# Altium PCB PCB1.PcbDoc (part 1 of 2)
Units mm, origin at the board's own origin, x right, y up, seen from the top; angles counter-clockwise.
Board outline 99.82 x 99.95 mm, 2 copper layers (Top Layer, Bottom Layer); 59 components, 66 nets, 248 pads, 0 vias.
Unrouted connection lines stored in the file: 139.
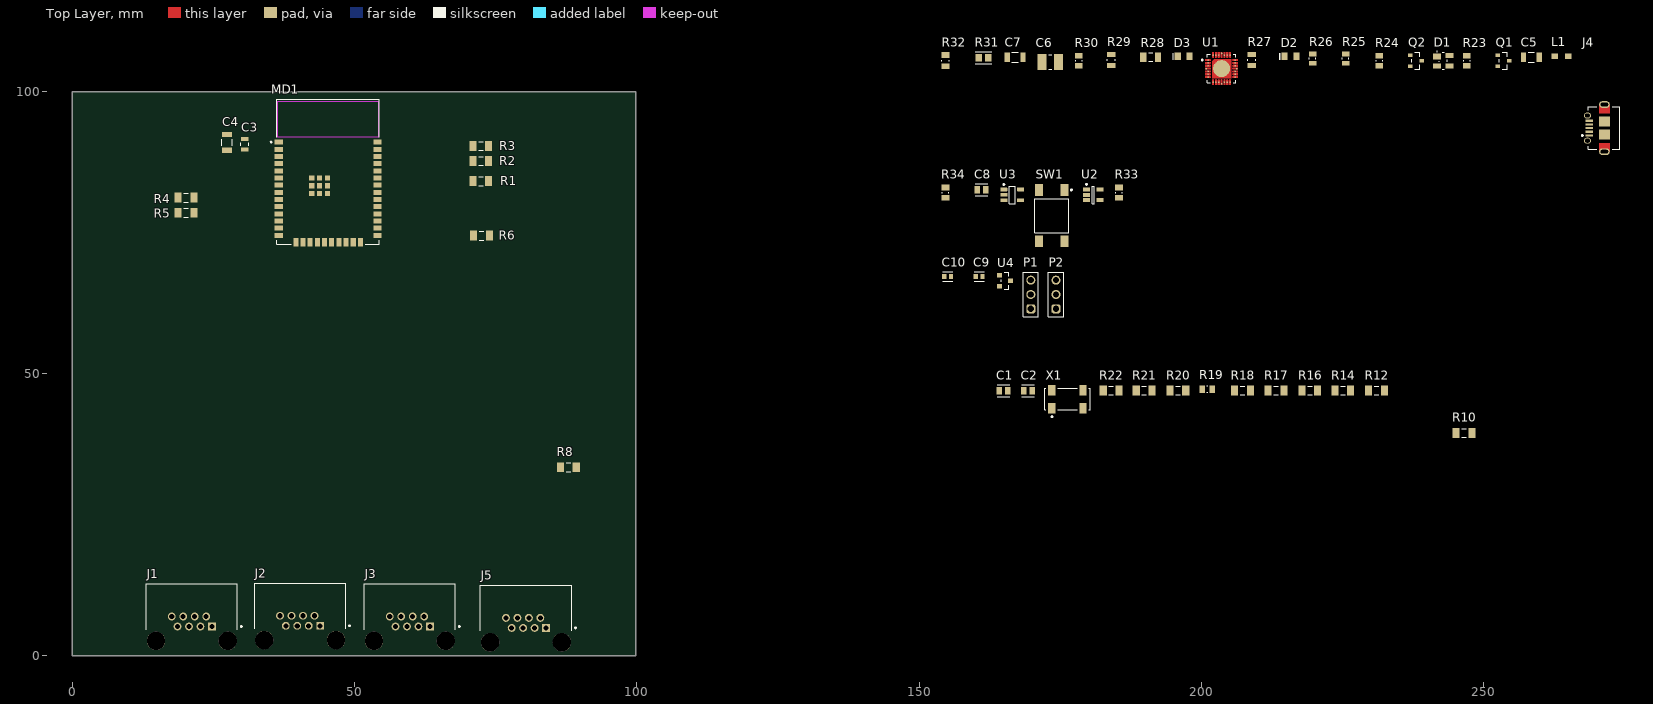
[diagram p0: Top Layer view]
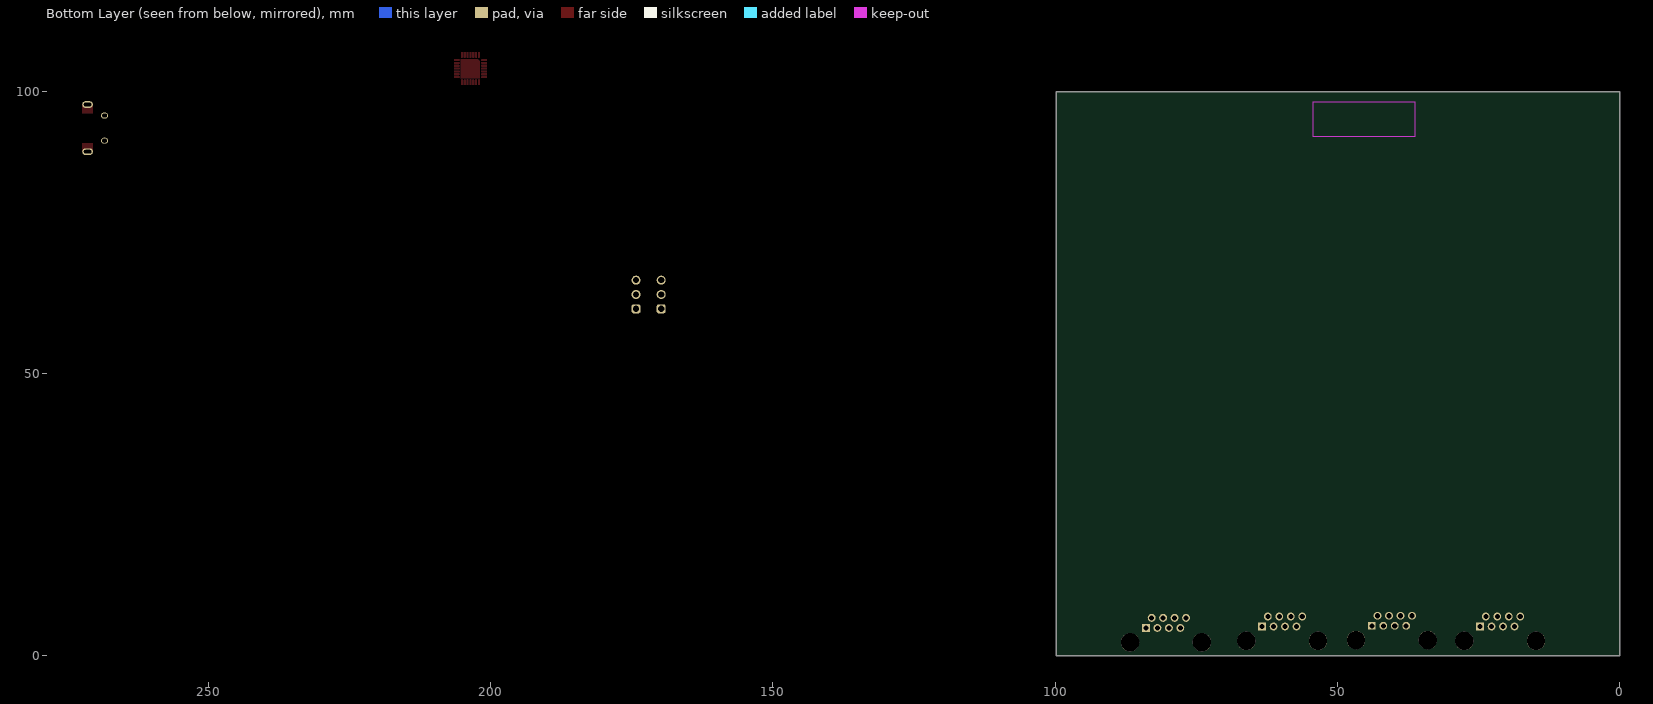
[diagram p1: Bottom Layer view, seen from below]

## Layer stack, top to bottom
Top Solder: solder mask 0.0102, Solder Resist, Dk 3.5
Top Layer: signal copper 0.0356
Dielectric 1: dielectric 0.32, FR-4, Dk 4.8
Bottom Layer: signal copper 0.0356
Bottom Solder: solder mask 0.0102, Solder Resist, Dk 3.5

## Board outline
0,0 99.822,0 99.822,99.949 0,99.949

## Design rules (kind name [scope] priority, off if disabled: settings)
Clearance [All] p1: gap=0.254 ignorepadtopadclearanceinfootprint=FALSE except(0: Arc-Hole Track-Hole SMDPad-Hole THPad-Hole Via-Hole Fill-Hole Poly-Hole Region-Hole Text-Hole)
PolygonConnect [All] p1: connectstyle=Relief reliefconductorwidth=0.254 reliefentries=4 polygonreliefangle="90 Angle" airgapwidth=0.254
RoutingVias [All] p1: holewidth=0.711 width=1.27 viastyle="Through Hole" minholewidth=0.711 minwidth=1.27 maxholewidth=0.711 maxwidth=1.27
SolderMaskExpansion [All] p1: expansion=0.102 istentingtop=FALSE
Width [All] p1: maxlimit=0.254 minlimit=0.254 preferedwidth=0.254
30 further rules are at their usual default settings.

## Classes and differential pairs
component class USB: C5 C6 C7 D1 D2 D3 J4 L1 Q1 Q2 R23 R24 R25 R26 R27 R28 R29 R30 R31 R32 U1
component class Programming: C8 R33 R34 SW1 U2 U3
component class Power: C9 C10 J5 P1 P2 U4
component class MCU: C1 C2 C3 C4 MD1 R1 R2 R3 R4 R5 R6 R8 R10 R12 R14 R16 R17 R18 R19 R20 R21 R22 X1
component class Connectors: J1 J2 J3

## Components (designator, comment, footprint, x,y, rotation, side; value= is the part's Value field where it differs from the comment)
C1 "C0805C120J5GACTU" FP-C0805C-DN-MFG 164.973,46.99 r0 top value="12 pF"
C2 "C0805C120J5GACTU" FP-C0805C-DN-MFG 169.291,46.99 r0 top value="12 pF"
C3 "GRM21BR60J226ME39L" FP-GRM21B-0_15-MFG 30.607,90.612 r90 top value=22uF
C4 "C1206C104K1RACTU" FP-C1206C-EB-MFG 27.432,90.935 r90 top value="0.10 μF"
C5 "C1206C104K1RACTU" FP-C1206C-EB-MFG 258.445,106.045 r0 top value="0.10 μF"
C6 "CAP 4.7uF 25V 1210(3225)" CAPC1210(3225)220_M 173.228,105.156 r0 top value=4.7uF
C7 "C1206C104K1RACTU" FP-C1206C-EB-MFG 167.005,106.045 r0 top value="0.10 μF"
C8 "C0805C106K8PACTU" FP-C0805C-DG-MFG 161.036,82.55 r0 top value=10uF
C9 "C0603C104K5RACTU" FP-C0603C-CF-MFG 160.655,67.183 r0 top value="0.10 μF"
C10 "C0603C104K5RACTU" FP-C0603C-CF-MFG 155.067,67.183 r0 top value="0.10 μF"
D1 "SP0503BAHTG" LFUS-SOT143-4_V 242.824,105.41 r0 top
D2 "150080YS75000" WL-SMCW_0805_150080xx75000 215.773,106.172 r0 top
D3 "150080YS75000" WL-SMCW_0805_150080xx75000 196.85,106.172 r0 top
J1 "RJHSE-5080" FP-RJHSE-5080-MFG 21.209,5.08 r0 top
J2 "RJHSE-5080" FP-RJHSE-5080-MFG 40.386,5.207 r0 top
J3 "RJHSE-5080" FP-RJHSE-5080-MFG 59.817,5.08 r0 top
J4 "47589-0001" MOLX-47589-0001_V 269.875,93.472 r90 top
J5 "RJHSE-5080" FP-RJHSE-5080-MFG 80.391,4.826 r0 top
L1 "742792093" SMD-0805 263.779,106.172 r0 top
MD1 "ESP32-WROOM-32E (4MB)" FP-ESP32-WROOM-32E_4MB-MFG 45.339,85.725 r0 top
P1 "61300311121" 61300311121 169.799,64.008 r90 top
P2 "61300311121" 61300311121 174.244,64.008 r90 top
Q1 "SS8050-G" FP-SS8050-G-MFG 253.492,105.41 r0 top
Q2 "SS8050-G" FP-SS8050-G-MFG 237.998,105.41 r0 top
R1 "TNPW1206100RBEEN" RESC3216X65X50NL15T25 72.387,84.074 r0 top value=100R
R2 "TNPW1206100RBEEN" RESC3216X65X50NL15T25 72.387,87.63 r180 top value=100R
R3 "TNPW1206100RBEEN" RESC3216X65X50NL15T25 72.387,90.297 r0 top value=100R
R4 "TNPW1206100RBEEN" RESC3216X65X50NL15T25 20.196,81.153 r180 top value=100R
R5 "TNPW1206100RBEEN" RESC3216X65X50NL15T25 20.19,78.486 r180 top value=100R
R6 "TNPW1206100RBEEN" RESC3216X65X50NL15T25 72.517,74.422 r180 top value=100R
R8 "TNPW1206100RBEEN" RESC3216X65X50NL15T25 87.884,33.401 r0 top value=100R
R10 "TNPW1206100RBEEN" RESC3216X65X50NL15T25 246.507,39.497 r0 top value=100R
R12 "TNPW1206100RBEEN" RESC3216X65X50NL15T25 231.013,46.99 r0 top value=100R
R14 "TNPW1206100RBEEN" RESC3216X65X50NL15T25 225.044,46.99 r0 top value=100R
R16 "TNPW1206100RBEEN" RESC3216X65X50NL15T25 219.202,46.99 r0 top value=100R
R17 "TNPW1206100RBEEN" RESC3216X65X50NL15T25 213.233,46.99 r0 top value=100R
R18 "TNPW1206100RBEEN" RESC3216X65X50NL15T25 207.264,46.99 r0 top value=100R
R19 "RC0805FR-0710KL" RESC2013X60X35NL10T20 201.041,47.244 r0 top value=10kR
R20 "TNPW1206100RBEEN" RESC3216X65X50NL15T25 195.834,46.99 r0 top value=100R
R21 "TNPW1206100RBEEN" RESC3216X65X50NL15T25 189.865,46.99 r0 top value=100R
R22 "TNPW1206100RBEEN" RESC3216X65X50NL15T25 184.023,46.99 r0 top value=100R
R23 "RC0805FR-0710KL" RESC2013X60X35NL10T20 247.015,105.41 r90 top value=10kR
R24 "RC0805FR-0710KL" RESC2013X60X35NL10T20 231.521,105.41 r90 top value=10kR
R25 "CRCW08050000Z0EA" RESC2013X50X30LL20T20 225.552,105.791 r90 top value=0R
R26 "CRCW08050000Z0EA" RESC2013X50X30LL20T20 219.71,105.791 r90 top value=0R
R27 "CRCW0805330RFKEA" FP-CRCW0805-e3-MFG 208.915,105.537 r90 top value=330R
R28 "RG3216P-2001-B-T1" RESC3216X50X50LL20T25 191.008,106.045 r0 top value=2kR
R29 "CRCW0805330RFKEA" FP-CRCW0805-e3-MFG 184.023,105.537 r90 top value=330R
R30 "RC0805FR-0710KL" RESC2013X60X35NL10T20 178.308,105.41 r90 top value=10kR
R31 "RMCF0805FT22K1" FP-RMCF0805-IPC_B 161.417,105.918 r0 top value=22.1kR
R32 "RN73C2A47K5BTD" FP-RN732A-MFG 154.686,105.41 r90 top value=47.5KΩ
R33 "RC0805FR-0710KL" RESC2013X60X35NL10T20 185.42,82.042 r90 top value=10kR
R34 "RC0805FR-0710KL" RESC2013X60X35NL10T20 154.686,82.042 r90 top value=10kR
SW1 "FSM4JSMATR" TECO-FSM4JSMATR_V 173.482,77.978 r0 top
U1 "CP2102N-A02-GQFN28R" FP-CP2102N-A02-GQFN28R-MFG 203.581,104.013 r0 top
U2 "MCP1316T-29LE/OT" SOT-23-OT5_M 180.848,81.661 r0 top
U3 "SN74LVC1G08DBVR" DBV0005A_M 166.497,81.661 r0 top
U4 "AP2120N-3.3TRG1" FP-SOT23-MFG 165.227,66.421 r0 top
X1 "ABS25-32.768KHZ-6-T" ABRA-ABS25-4_V 176.276,45.466 r0 top

## Footprints (in the part's own frame and the unit in brackets; to place one, negate y for a bottom-side part, rotate by r counter-clockwise, add the part's x,y. Pads: shape width x height; smd on the part's side, far side on the other; paste and mask are expansions set on the pad)
61300311121 [mm] "Pin Header, pitch 2.54 mm, THT, Vertical, single row, 3p"
  rrect50% 1.6x1.6 hole 1.1: 1(-2.54,0)
  round 1.6 hole 1.1: 2(0,0) 3(2.54,0)
  silkscreen extent -3.96,-1.35 3.96,1.35, body extent -3.81,-1.27 3.81,1.27, height 8.57
ABRA-ABS25-4_V [mm] "SMD, 4-Leads, Body 8x3.8mm, Pitch 5.5mm, Height 2.5mm"
  rect 1.3x1.9 smd: 1(-2.75,-1.6) 2(2.75,-1.6) 3(2.75,1.6) 4(-2.75,1.6)
  silkscreen extent -4,-3.22 4,1.9, body extent -4,-2 4,2, height 2.66
CAPC1210(3225)220_M [mm] "Chip Capacitor, Body 3.2x2.5mm, Height 2.2mm, IPC Low Density"
  rect 1.6x2.8 smd: 1(-1.475,0) 2(1.475,0)
  silkscreen extent -0.3,-1.3 0.3,1.3, body extent -1.7,-1.35 1.7,1.35, height 2.2
DBV0005A_M [mm] "SOT23, 5-Leads, Body 3.05x1.75mm, Pitch 0.95mm, IPC Low Density"
  rrect15% 1.2x0.65 smd: 1(-1.475,0.95) 2(-1.475,0) 3(-1.475,-0.95) 4(1.475,-0.95) 5(1.475,0.95)
  silkscreen extent -1.6,-1.55 0.5,1.95, body extent -1.42,-1.46 1.42,1.46, height 1.08
FP-C0603C-CF-MFG [mm]
  rect 0.75x0.9 smd paste+0 mask+0: 1(-0.6,0) 2(0.6,0)
  silkscreen extent -0.87,-0.85 0.88,0.85, body extent -1.2,-0.6 1.2,0.6, height 0.25
FP-C0805C-DG-MFG [mm]
  rect 0.95x1.35 smd paste+0 mask+0: 1(-0.75,0) 2(0.75,0)
  silkscreen extent -1.11,-1.08 1.1,1.07, body extent -1.4,-0.85 1.4,0.85, height 0.25
FP-C0805C-DN-MFG [mm]
  rect 0.95x1.35 smd paste+0 mask+0: 1(-0.75,0) 2(0.75,0)
  silkscreen extent -1.1,-1.07 1.1,1.07, body extent -1.4,-0.85 1.4,0.85, height 0.25
FP-C1206C-EB-MFG [mm]
  rect 0.95x1.7 smd paste+0 mask+0: 1(-1.4,0) 2(1.4,0)
  silkscreen extent -0.55,-0.9 0.55,0.9, body extent -2,-1 2,1, height 0.25
FP-CP2102N-A02-GQFN28R-MFG [mm]
  round 0.27 smd paste+0 mask+0: 1(-2.4,1.5) 2(-2.4,1) 3(-2.4,0.5) 4(-2.725,0) 5(-2.4,-0.5) 6(-2.4,-1) 7(-2.4,-1.5) 8(-1.5,-2.4) 9(-1,-2.4) 10(-0.5,-2.4) 11(0,-2.725) 12(0.5,-2.4) 13(1,-2.4) 14(1.5,-2.4) 15(2.4,-1.5) 16(2.4,-1) 17(2.4,-0.5) 18(2.675,0) 19(2.4,0.5) 20(2.4,1) 21(2.4,1.5) 22(1.5,2.4) 23(1,2.4) 24(0.5,2.4) 25(0,2.675) 26(-0.5,2.4) 27(-1,2.4) 28(-1.5,2.4)
  round 3.015 smd paste-1000 mask+0: 29(0,0)
  Top Layer region: -1.325,1.675 1.675,1.675 1.675,-1.675 -1.675,-1.675 -1.675,1.325 -1.325,1.675
  Top Layer region: -1.35,2.875 -1.35,2.075 -1.361,2.018 -1.394,1.969 -1.443,1.936 -1.5,1.925 -1.5,1.925 -1.557,1.936 -1.606,1.969 -1.639,2.018 -1.65,2.075 -1.65,2.075 -1.65,2.875
  Top Layer region: -0.85,2.875 -0.85,2.075 -0.861,2.018 -0.894,1.969 -0.943,1.936 -1,1.925 -1,1.925 -1.057,1.936 -1.106,1.969 -1.139,2.018 -1.15,2.075 -1.15,2.075 -1.15,2.875
  Top Layer region: -0.35,2.875 -0.35,2.075 -0.361,2.018 -0.394,1.969 -0.443,1.936 -0.5,1.925 -0.5,1.925 -0.557,1.936 -0.606,1.969 -0.639,2.018 -0.65,2.075 -0.65,2.075 -0.65,2.875
  Top Layer region: 0.15,2.875 0.15,2.075 0.139,2.018 0.106,1.969 0.057,1.936 0,1.925 0,1.925 -0.057,1.936 -0.106,1.969 -0.139,2.018 -0.15,2.075 -0.15,2.075 -0.15,2.875
  Top Layer region: 0.65,2.875 0.65,2.075 0.639,2.018 0.606,1.969 0.557,1.936 0.5,1.925 0.5,1.925 0.443,1.936 0.394,1.969 0.361,2.018 0.35,2.075 0.35,2.075 0.35,2.875
  Top Layer region: 1.15,2.875 1.15,2.075 1.139,2.018 1.106,1.969 1.057,1.936 1,1.925 1,1.925 0.943,1.936 0.894,1.969 0.861,2.018 0.85,2.075 0.85,2.075 0.85,2.875
  Top Layer region: 1.65,2.875 1.65,2.075 1.639,2.018 1.606,1.969 1.557,1.936 1.5,1.925 1.5,1.925 1.443,1.936 1.394,1.969 1.361,2.018 1.35,2.075 1.35,2.075 1.35,2.875
  Top Layer region: 2.875,1.35 2.075,1.35 2.018,1.361 1.969,1.394 1.936,1.443 1.925,1.5 1.925,1.5 1.936,1.557 1.969,1.606 2.018,1.639 2.075,1.65 2.075,1.65 2.875,1.65
  Top Layer region: 2.875,0.85 2.075,0.85 2.018,0.861 1.969,0.894 1.936,0.943 1.925,1 1.925,1 1.936,1.057 1.969,1.106 2.018,1.139 2.075,1.15 2.075,1.15 2.875,1.15
  Top Layer region: 2.875,0.35 2.075,0.35 2.018,0.361 1.969,0.394 1.936,0.443 1.925,0.5 1.925,0.5 1.936,0.557 1.969,0.606 2.018,0.639 2.075,0.65 2.075,0.65 2.875,0.65
  Top Layer region: 2.875,-0.15 2.075,-0.15 2.018,-0.139 1.969,-0.106 1.936,-0.057 1.925,0 1.925,0 1.936,0.057 1.969,0.106 2.018,0.139 2.075,0.15 2.075,0.15 2.875,0.15
  Top Layer region: 2.875,-0.65 2.075,-0.65 2.018,-0.639 1.969,-0.606 1.936,-0.557 1.925,-0.5 1.925,-0.5 1.936,-0.443 1.969,-0.394 2.018,-0.361 2.075,-0.35 2.075,-0.35 2.875,-0.35
  Top Layer region: 2.875,-1.15 2.075,-1.15 2.018,-1.139 1.969,-1.106 1.936,-1.057 1.925,-1 1.925,-1 1.936,-0.943 1.969,-0.894 2.018,-0.861 2.075,-0.85 2.075,-0.85 2.875,-0.85
  Top Layer region: 2.875,-1.65 2.075,-1.65 2.018,-1.639 1.969,-1.606 1.936,-1.557 1.925,-1.5 1.925,-1.5 1.936,-1.443 1.969,-1.394 2.018,-1.361 2.075,-1.35 2.075,-1.35 2.875,-1.35
  Top Layer region: 1.35,-2.875 1.35,-2.075 1.361,-2.018 1.394,-1.969 1.443,-1.936 1.5,-1.925 1.5,-1.925 1.557,-1.936 1.606,-1.969 1.639,-2.018 1.65,-2.075 1.65,-2.075 1.65,-2.875
  Top Layer region: 0.85,-2.875 0.85,-2.075 0.861,-2.018 0.894,-1.969 0.943,-1.936 1,-1.925 1,-1.925 1.057,-1.936 1.106,-1.969 1.139,-2.018 1.15,-2.075 1.15,-2.075 1.15,-2.875
  Top Layer region: 0.35,-2.875 0.35,-2.075 0.361,-2.018 0.394,-1.969 0.443,-1.936 0.5,-1.925 0.5,-1.925 0.557,-1.936 0.606,-1.969 0.639,-2.018 0.65,-2.075 0.65,-2.075 0.65,-2.875
  Top Layer region: -0.15,-2.875 -0.15,-2.075 -0.139,-2.018 -0.106,-1.969 -0.057,-1.936 0,-1.925 0,-1.925 0.057,-1.936 0.106,-1.969 0.139,-2.018 0.15,-2.075 0.15,-2.075 0.15,-2.875
  Top Layer region: -0.65,-2.875 -0.65,-2.075 -0.639,-2.018 -0.606,-1.969 -0.557,-1.936 -0.5,-1.925 -0.5,-1.925 -0.443,-1.936 -0.394,-1.969 -0.361,-2.018 -0.35,-2.075 -0.35,-2.075 -0.35,-2.875
  Top Layer region: -1.15,-2.875 -1.15,-2.075 -1.139,-2.018 -1.106,-1.969 -1.057,-1.936 -1,-1.925 -1,-1.925 -0.943,-1.936 -0.894,-1.969 -0.861,-2.018 -0.85,-2.075 -0.85,-2.075 -0.85,-2.875
  Top Layer region: -1.65,-2.875 -1.65,-2.075 -1.639,-2.018 -1.606,-1.969 -1.557,-1.936 -1.5,-1.925 -1.5,-1.925 -1.443,-1.936 -1.394,-1.969 -1.361,-2.018 -1.35,-2.075 -1.35,-2.075 -1.35,-2.875
  Top Layer region: -2.875,-1.35 -2.075,-1.35 -2.018,-1.361 -1.969,-1.394 -1.936,-1.443 -1.925,-1.5 -1.925,-1.5 -1.936,-1.557 -1.969,-1.606 -2.018,-1.639 -2.075,-1.65 -2.075,-1.65 -2.875,-1.65
  Top Layer region: -2.875,-0.85 -2.075,-0.85 -2.018,-0.861 -1.969,-0.894 -1.936,-0.943 -1.925,-1 -1.925,-1 -1.936,-1.057 -1.969,-1.106 -2.018,-1.139 -2.075,-1.15 -2.075,-1.15 -2.875,-1.15
  Top Layer region: -2.875,-0.35 -2.075,-0.35 -2.018,-0.361 -1.969,-0.394 -1.936,-0.443 -1.925,-0.5 -1.925,-0.5 -1.936,-0.557 -1.969,-0.606 -2.018,-0.639 -2.075,-0.65 -2.075,-0.65 -2.875,-0.65
  Top Layer region: -2.875,0.15 -2.075,0.15 -2.018,0.139 -1.969,0.106 -1.936,0.057 -1.925,0 -1.925,0 -1.936,-0.057 -1.969,-0.106 -2.018,-0.139 -2.075,-0.15 -2.075,-0.15 -2.875,-0.15
  Top Layer region: -2.875,0.65 -2.075,0.65 -2.018,0.639 -1.969,0.606 -1.936,0.557 -1.925,0.5 -1.925,0.5 -1.936,0.443 -1.969,0.394 -2.018,0.361 -2.075,0.35 -2.075,0.35 -2.875,0.35
  Top Layer region: -2.875,1.15 -2.075,1.15 -2.018,1.139 -1.969,1.106 -1.936,1.057 -1.925,1 -1.925,1 -1.936,0.943 -1.969,0.894 -2.018,0.861 -2.075,0.85 -2.075,0.85 -2.875,0.85
  Top Layer region: -2.875,1.65 -2.075,1.65 -2.018,1.639 -1.969,1.606 -1.936,1.557 -1.925,1.5 -1.925,1.5 -1.936,1.443 -1.969,1.394 -2.018,1.361 -2.075,1.35 -2.075,1.35 -2.875,1.35
  silkscreen extent -3.55,-2.55 2.55,2.55, body extent -2.98,-2.98 2.98,2.98, height 0.25
FP-CRCW0805-e3-MFG [mm]
  rect 0.95x1.45 smd paste+0 mask+0: 1(-0.975,0) 2(0.975,0)
  silkscreen extent -0.13,-0.7 0.13,0.7, body extent -1.55,-0.82 1.55,0.82, height 0.25
FP-ESP32-WROOM-32E_4MB-MFG [mm]
  rect 1.5x0.9 smd paste+0 mask+0: 1(-8.75,5.26) 2(-8.75,3.99) 3(-8.75,2.72) 4(-8.75,1.45) 5(-8.75,0.18) 6(-8.75,-1.09) 7(-8.75,-2.36) 8(-8.75,-3.63) 9(-8.75,-4.9) 10(-8.75,-6.17) 11(-8.75,-7.44) 12(-8.75,-8.71) 13(-8.75,-9.98) 14(-8.75,-11.25) 25(8.75,-11.25) 26(8.75,-9.98) 27(8.75,-8.71) 28(8.75,-7.44) 29(8.75,-6.17) 30(8.75,-4.9) 31(8.75,-3.63) 32(8.75,-2.36) 33(8.75,-1.09) 34(8.75,0.18) 35(8.75,1.45) 36(8.75,2.72) 37(8.75,3.99) 38(8.75,5.26)
  rect 0.9x1.5 smd paste+0 mask+0: 15(-5.71,-12.5) 16(-4.44,-12.5) 17(-3.17,-12.5) 18(-1.9,-12.5) 19(-0.63,-12.5) 20(0.64,-12.5) 21(1.91,-12.5) 22(3.18,-12.5) 23(4.45,-12.5) 24(5.72,-12.5)
  rect 0.9x0.9 smd paste+0 mask+0: 39(-2.9,-3.86) 39(-2.9,-2.46) 39(-2.9,-1.06) 39(-1.5,-3.86) 39(-1.5,-2.46) 39(-1.5,-1.06) 39(-0.1,-3.86) 39(-0.1,-2.46) 39(-0.1,-1.06)
  Keep-Out Layer region: -9,6.205 9,6.205 9,12.395 -9,12.395
  Keep-Out Layer region: -9,6.205 9,6.205 9,12.395 -9,12.395
  silkscreen extent -10.2,-12.83 9.08,12.83, body extent -9.6,-13.35 9.6,12.93, height 0.25
FP-GRM21B-0_15-MFG [mm]
  rect 0.7x1.3 smd paste+0 mask+0: 1(-0.95,0) 2(0.95,0)
  silkscreen extent -0.23,-0.7 0.23,0.7, body extent -1.4,-0.8 1.4,0.8, height 0.25
FP-RJHSE-5080-MFG [mm]
  rect 1.39x1.39 hole 0.89 paste-1000 mask+0: 1(3.556,0.127)
  round 1.39 hole 0.89 paste-1000 mask+0: 2(2.54,1.905) 3(1.524,0.127) 4(0.508,1.905) 5(-0.508,0.127) 6(-1.524,1.905) 7(-2.54,0.127) 8(-3.556,1.905)
  round 3.25 hole 3.25 unplated paste-1000 mask+0: ""(-6.35,-2.413) ""(6.35,-2.413)
  silkscreen extent -8.06,-0.41 8.89,7.68, body extent -8.16,-7.78 8.16,7.78, height 0.25
FP-RMCF0805-IPC_B [mm]
  rect 1.155x1.362 smd paste+0 mask+0: 1(-0.876,0) 2(0.876,0)
  silkscreen extent -1.45,-1.08 1.45,1.08, body extent -1.7,-0.93 1.7,0.93, height 0.25
FP-RN732A-MFG [mm]
  rect 1x1.35 smd paste+0 mask+0: 1(-1,0) 2(1,0)
  silkscreen extent -0.13,-0.7 0.13,0.7, body extent -1.6,-0.8 1.6,0.8, height 0.25
FP-SOT23-MFG [mm]
  rect 0.9x0.8 smd paste+0 mask+0: 1(-1,0.95) 2(-1,-0.95) 3(1,0)
  silkscreen extent -0.7,-1.5 0.7,1.5, body extent -1.55,-1.6 1.55,1.6, height 0.25
FP-SS8050-G-MFG [mm]
  rect 0.8x0.6 smd paste+0 mask+0: 1(-1.01,0.95) 2(-1.01,-0.95) 3(1.01,0)
  silkscreen extent -0.7,-1.5 0.7,1.5, body extent -1.51,-1.6 1.51,1.6, height 0.25
LFUS-SOT143-4_V [mm] "SOT143, 4-Leads, Body 3.04x1.4mm, Pitch 1.90mm"
  rect 1.4x1.1 smd: 1(-1.1,0.75)
  rect 1.4x0.9 smd: 2(-1.1,-0.95) 3(1.1,-0.95) 4(1.1,0.95)
  silkscreen extent -1.15,-1.5 0.7,1.65, body extent -0.7,-1.52 0.7,1.52, height 1.22
MOLX-47589-0001_V [mm] "SMD, 5-Leads, Body 7.5x5.6mm, Pitch 0.65mm"
  rect 0.4x1.35 smd: 1(-1.3,1.175) 2(-0.65,1.175) 3(0,1.175) 4(0.65,1.175) 5(1.3,1.175)
  oval 1.05x1.25 hole 0.65 slot 0.85 at 90 deg: 6(-2.225,1.5) 7(2.225,1.5)
  oval 1.2x1.9 hole 0.6 slot 1.3 at 90 deg: 8(-4.175,-1.5) 11(4.175,-1.5)
  rect 1.8x1.9 smd: 9(-1.15,-1.5) 10(1.15,-1.5)
  Top Layer region: 2.6,-2.45 4.175,-2.45 4.175,-0.55 2.6,-0.55
  Top Layer region: -2.6,-0.55 -4.175,-0.55 -4.175,-2.45 -2.6,-2.45
  silkscreen extent -3.75,-4.25 3.75,2.52, body extent -4.32,-4.25 4.32,1.64, height 2.74
RESC2013X50X30LL20T20 [mm] "Chip Resistor, 2-Leads, Body 2.00x1.25mm, IPC High Density"
  rect 0.85x1.35 smd: 1(-0.825,0) 2(0.825,0)
  silkscreen extent -0.1,-0.58 0.1,0.58, body extent -1.1,-0.72 1.1,0.72, height 0.5
RESC2013X60X35NL10T20 [mm] "Chip Resistor, 2-Leads, Body 2.1x1.35mm, IPC Medium Density"
  rect 1x1.35 smd: 1(-0.9,0) 2(0.9,0)
  silkscreen extent -0.1,-0.58 0.1,0.58, body extent -1.05,-0.68 1.05,0.67, height 0.6
RESC3216X50X50LL20T25 [mm] "Chip Resistor, 2-Leads, Body 3.20x1.60mm, IPC High Density"
  rect 1.1x1.7 smd: 1(-1.3,0) 2(1.3,0)
  silkscreen extent -0.35,-0.75 0.35,0.75, body extent -1.7,-0.9 1.7,0.9, height 0.5
RESC3216X65X50NL15T25 [mm] "Chip Resistor, 2-Leads, Body 3.20x1.60mm, IPC Medium Density"
  rect 1.25x1.75 smd: 1(-1.4,0) 2(1.4,0)
  silkscreen extent -0.4,-0.77 0.4,0.77, body extent -1.68,-0.87 1.68,0.87, height 0.65
SMD-0805 [mm] "Chip Inductor, 2-Leads, Body 2.0x1.2mm"
  rect 1.15x1 smd: 1(-1.175,0) 2(1.175,0)
  body extent -1,-0.6 1,0.6, height 0.89
SOT-23-OT5_M [mm] "SOT23, 5-Leads, Body 2.9x1.7mm, Pitch 0.95mm, Lead Span 2.8mm, IPC Low Density"
  rect 1.3x0.7 smd: 1(-1.2,0.95) 2(-1.2,0) 3(-1.2,-0.95) 4(1.2,-0.95) 5(1.2,0.95)
  silkscreen extent -1.32,-1.55 0.15,1.97, body extent -0.9,-1.55 0.9,1.55, height 1.45
TECO-FSM4JSMATR_V [mm] "SMD, 4-Leads, Body 6x6mm, Pitch 4.5mm"
  rect 1.4x2.1 smd: 1(2.25,4.55) 2(2.25,-4.55) 3(-2.25,4.55) 4(-2.25,-4.55)
  silkscreen extent -3,-3 3.63,4.67, body extent -3,-5 3,5, height 5.08
WL-SMCW_0805_150080xx75000 [mm] "SMD Mono-color Chip LED, body 2.0x1.25mm"
  rect 1.1x1.3 smd: 1(-1.05,0) 2(1.05,0)
  silkscreen extent -2,-0.6 -1.8,0.6, body extent -1,-0.63 1,0.62, height 0.7

## Part data
C1 C2: library part CMP-2007-00441-2, "CAP CER 12PF 50V C0G/NP0 0805", Capacitance="12 pF", Capacitor Type=Ceramic, Case/Package=0805, Manufacturer=KEMET, Max Operating Temperature=125°C, Min Operating Temperature=-55°C, Package=C0805C-DN, Package Shape=Rectangular, Rated DC Voltage (URdc)=50V, Supplier Part Number=399-C0805C120J5GAC7800CT-ND, Temperature="-55°C to +125°C", Temperature Characteristic=C0G, Temperature Coefficient=30ppm/°C, Temperature Range High=+125°C, Tolerance=0.05, Tolerance  (fill in as +-)=5%, Voltage Rating="50 V", Automotive=No, Category=Cap, ComponentLink1Description=https://datasheet.ciiva.com:443/pdfs/VipMasterIC/IC/KEME/KEME-S-A0007600110/KEME-S-A0007597378-1.pdf?src-supplier=IHS+Markit, ComponentLink1URL=https://datasheet.ciiva.com:443/pdfs/VipMasterIC/IC/KEME/KEME-S-A0007600110/KEME-S-A0007597378-1.pdf?src-supplier=IHS+Markit, ComponentLink2Description=Datasheet, ComponentLink2URL=https://content.kemet.com/datasheets/KEM_C1003_C0G_SMD.pdf, Device Class L1="Passive Components", Device Class L2=Capacitors, Device Class L3="Ceramic Capacitors", Dielectric Material=Ceramic, Digikey Description="CAP CER 12PF 50V C0G/NP0 0805", Height=0.88mm, Ipc Land Pattern Name=CAPC200125X78, JESD-609 Code=e3, Lead Free=Yes, Manufacturer Part Number=C0805C120J5GACTU, Material=Ceramic, Mounting Technology="Surface Mount", Mouser Description="Multilayer Ceramic Capacitors MLCC - SMD/SMT 50volts 12pF C0G 5%", Multilayer=Yes, Octopart=https://octopart.com/c0805c120j5gactu-kemet-126518, Packaging="Tape and Reel", Pins=2, Pricing="1=0.12, 10=0.081, 50=0.0482, 100=0.038, 500=0.02804, 1000=0.02321 (USD)", Reach SVHC Compliant=Yes, RoHS=TRUE, RoHS Compliant=Yes, Stock=105044, Supplier=Digikey, Temperature Characteristics Code=C0G, Temperature Range Low=-55°C, Terminal Finish=Nickel, Termination=Wraparound, Tolerance (fill in as +-)=5%
C3: library part CMP-2007-03385-2, "Chip Multilayer Ceramic Capacitors for General Purpose, 0805, 22uF, X5R, 15%, 20%, 6.3V", Capacitance=22uF, Capacitor Type=Ceramic, Case Code (Imperial)=0805, Case Code (Metric)=2012, Dielectric=X5R, Manufacturer=Murata, Max Operating Temperature=85°C, Min Operating Temperature=-55°C, Package Quantity=1, Package Shape=Rectangular, Package Style=SMTMeter, Rated DC Voltage (URdc)=6.3V, Supplier Part Number=490-1719-1-ND, Tolerance=20%, Case/Package=0805, Category="Ceramic Capacitors", ComponentLink1Description=https://psearch.en.murata.com:443/capacitor/product/GRM21BR60J226ME39%23.pdf?src-supplier=IHS+Markit, ComponentLink1URL=https://psearch.en.murata.com:443/capacitor/product/GRM21BR60J226ME39%23.pdf?src-supplier=IHS+Markit, Depth=1.25mm, Dielectric Material=Ceramic, Height=1.25mm, JESD-609 Code=e3, Lead Free="Lead Free", Length=2mm, Manufacturer Part Number=GRM21BR60J226ME39L, Material=Ceramic, Mount="Surface Mount", Mounting Technology="Surface Mount", Multilayer=Yes, Packaging="Tape and Reel", Pins=2, Pricing="1=0.3, 10=0.196, 50=0.1444, 100=0.1177, 500=0.09288, 1000=0.07844 (USD)", Radiation Hardening=No, REACH SVHC="No SVHC", Reach SVHC Compliant=Yes, RoHS=Yes, RoHS Compliant=Yes, Stock=3670406, Supplier=Digikey, Temperature Characteristics Code=X5R, Terminal Finish=Nickel, Termination=SMD/SMT, Thickness=0.053inch, Tolerance  (fill in as +-)=20%, Tolerance (fill in as +-)=20%, Voltage=6.3V, Voltage Rating=6.3V, Voltage Rating (DC)=6.3V, Width=0.049inch
C4 C5 C7: library part CMP-03020-000153-1, "CAP CER 0.1UF 100V X7R 1206", Capacitance="0.10 μF", Capacitor Type=Ceramic, Case/Package=1206, Manufacturer=KEMET, Max Operating Temperature=125°C, Min Operating Temperature=-55°C, Package=C1206C-EB, Package Shape=Rectangular, Package Style=SMTMeter, Rated DC Voltage (URdc)=100V, Supplier Part Number=399-C1206C104K1RAC7800CT-ND, Temperature="-55°C to +150°C", Temperature Characteristic=X7R, Temperature Coefficient=15%, Temperature Range High=+150°C, Tolerance=0.1, Tolerance  (fill in as +-)=10%, Voltage Rating="100 V", Automotive=Yes, Automotive Grade="Grade 0", Category=Cap, ComponentLink1Description=https://datasheet.ciiva.com:443/pdfs/VipMasterIC/IC/KEME/KEME-S-A0008991654/KEME-S-A0008991654-1.pdf?src-supplier=IHS+Markit, ComponentLink1URL=https://datasheet.ciiva.com:443/pdfs/VipMasterIC/IC/KEME/KEME-S-A0008991654/KEME-S-A0008991654-1.pdf?src-supplier=IHS+Markit, ComponentLink2Description=Datasheet, ComponentLink2URL=https://content.kemet.com/datasheets/KEM_C1007_X8R_ULTRA_150C_SMD.pdf, Device Class L1="Passive Components", Device Class L2=Capacitors, Device Class L3="Ceramic Capacitors", Dielectric Material=Ceramic, Digikey Description="CAP CER 0.1UF 100V X7R 1206", Height=0.88mm, Ipc Land Pattern Name=CAPC320160X78, JESD-609 Code=e3, Lead Free=Yes, Length=3.2mm, Manufacturer Part Number=C1206C104K1RACTU, Material=Ceramic, Mounting Technology="Surface Mount", Mouser Description="CAP CER 0.1UF 100V X7R 1206", Multilayer=Yes, Octopart=https://octopart.com/c1206c104k1ractu-kemet-89521, Packaging="Tape and Reel", Pins=2, Pricing="1=0.22, 10=0.144, 50=0.101, 100=0.0816, 500=0.0606, 1000=0.05302 (USD)", Reach SVHC Compliant=Yes, RoHS=TRUE, RoHS Compliant=Yes, Stock=96437, Supplier=Digikey, Temperature Characteristics Code=X7R, Temperature Range Low=-55°C, Terminal Finish=Nickel, Termination=Wraparound, Tolerance (fill in as +-)=10%, Width=1.6mm
C6: library part CMP-1038-02151-2, "CAP 4.7uF 25V ±10% 1210 (3225 Metric) Thickness 2.2mm SMD", Capacitor Type=Ceramic, Case-EIA=1210, Case-Metric=3225, Manufacturer=KEMET, Manufacturer Part Number=C1210C475K3RACTU, Max Operating Temperature=125°C, Min Operating Temperature=-55°C, Package Shape=Rectangular, Package Style=SMTMeter, Rated DC Voltage (URdc)=25V, Rated Voltage="25 V", Supplier Part Number=399-C1210C475K3RAC7800CT-ND, Temperature Characteristics Code=X7R, Tolerance=Â±10%, Tolerance  (fill in as +-)=10%, Case/Package=1210, Category="Ceramic Capacitors", ComponentLink1Description=https://datasheet.ciiva.com:443/pdfs/VipMasterIC/IC/KEME/KEME-S-A0008991654/KEME-S-A0008991654-1.pdf?src-supplier=IHS+Markit, ComponentLink1URL=https://datasheet.ciiva.com:443/pdfs/VipMasterIC/IC/KEME/KEME-S-A0008991654/KEME-S-A0008991654-1.pdf?src-supplier=IHS+Markit, Dielectric Material=Ceramic, Height=1.25mm, JESD-609 Code=e3, Length=3.2mm, Max Thickness="2.2 mm", Mounting Technology="Surface Mount", Multilayer=Yes, Packaging="Tape and Reel", Pins=2, Pricing="1=0.66, 10=0.462, 50=0.3888, 100=0.3166, 500=0.26386, 1000=0.2222 (USD)", Reach SVHC Compliant=Yes, RoHS=Yes, RoHS Compliant=Yes, Stock=9226, Supplier=Digikey, Technology=SMT, Terminal Finish=Nickel, Termination=Wraparound, Tolerance (fill in as +-)=10%, Width=2.5mm
C8: library part CMP-2007-03243-2, "CAP CER 10UF 10V X5R 0805", 3DS Part Number=220-00001, Capacitance=10uF, Capacitor Type=Ceramic, Case/Package=0805, Manufacturer=Kemet, Max Operating Temperature=85°C, Min Operating Temperature=-55°C, Package=C0805C-DG, Package Shape=Rectangular, Package Style=SMTMeter, Rated DC Voltage (URdc)=10V, Supplier Part Number=399-C0805C106K8PAC7800DKR-ND, Temperature="-55°C to +85°C", Temperature Characteristic=X5R, Temperature Coefficient=15%, Temperature Range High=+85°C, Tolerance=10%, Automotive=No, Category=Cap, ComponentLink1Description=https://datasheet.ciiva.com:443/pdfs/VipMasterIC/IC/KEME/KEME-S-A0008991665/KEME-S-A0008991665-1.pdf?src-supplier=IHS+Markit, ComponentLink1URL=https://datasheet.ciiva.com:443/pdfs/VipMasterIC/IC/KEME/KEME-S-A0008991665/KEME-S-A0008991665-1.pdf?src-supplier=IHS+Markit, ComponentLink2Description=Datasheet, ComponentLink2URL=https://content.kemet.com/datasheets/KEM_C1006_X5R_SMD.pdf, Device Class L1="Passive Components", Device Class L2=Capacitors, Device Class L3="Ceramic Capacitors", Dielectric Material=Ceramic, Digikey Description="CAP CER 10UF 10V X5R 0805", Height=1.4mm, Ipc Land Pattern Name=CAPC200125X125, JESD-609 Code=e3, Lead Free=Yes, Length=2mm, Manufacturer Part Number=C0805C106K8PACTU, Material=Ceramic, Mounting Technology="Surface Mount", Mouser Description="CAP CER 10UF 10V X5R 0805", Multilayer=Yes, Octopart=https://octopart.com/c0805c106k8pactu-kemet-98697, Packaging="Tape and Reel", Pins=2, Pricing="1=0.14, 10=0.098, 50=0.0584, 100=0.0459, 500=0.03388, 1000=0.02805 (USD)", Reach SVHC Compliant=Yes, RoHS=TRUE, RoHS Compliant=Yes, Stock=5628606, Supplier=Digikey, Temperature Characteristics Code=X5R, Temperature Range Low=-55°C, Terminal Finish=Nickel, Termination=Wraparound, Tolerance  (fill in as +-)=10%, Tolerance (fill in as +-)=10%, Voltage=10V, Voltage Rating=10V, Width=1.25mm
C9 C10: library part CMP-2006-03061-2, "CAP CER 0.1UF 50V X7R 0603", Capacitance="0.10 μF", Capacitor Type=Ceramic, Case/Package=0603, Manufacturer=KEMET, Max Operating Temperature=125°C, Min Operating Temperature=-55°C, Package=C0603C-CF, Package Shape=Rectangular, Package Style=SMTMeter, Rated DC Voltage (URdc)=50V, Supplier Part Number=399-C0603C104K5RAC7867CT-ND, Temperature="-55°C to +125°C", Temperature Characteristic=X7R, Temperature Coefficient=30ppm/°C, Temperature Range High=+125°C, Tolerance=0.1, Tolerance  (fill in as +-)=10%, Voltage Rating="50 V", Automotive=Yes, Automotive Grade="Grade 1", Category=Cap, ComponentLink1Description=https://datasheet.ciiva.com:443/pdfs/VipMasterIC/IC/KEME/KEME-S-A0008991654/KEME-S-A0008991654-1.pdf?src-supplier=IHS+Markit, ComponentLink1URL=https://datasheet.ciiva.com:443/pdfs/VipMasterIC/IC/KEME/KEME-S-A0008991654/KEME-S-A0008991654-1.pdf?src-supplier=IHS+Markit, ComponentLink2Description=Datasheet, ComponentLink2URL=https://api.kemet.com/component-edge/download/datasheet/C0603C100J5GACAUTO.pdf, Device Class L1="Passive Components", Device Class L2=Capacitors, Device Class L3="Ceramic Capacitors", Dielectric Material=Ceramic, Digikey Description="CAP CER 0.1UF 50V X7R 0603", Height=0.87mm, JESD-609 Code=e3, Lead Free=Yes, Length=1.6mm, Manufacturer Part Number=C0603C104K5RACTU, Material=Ceramic, Mounting Technology="Surface Mount", Multilayer=Yes, Octopart=https://octopart.com/c0603c104k5ractu-kemet-139244, Packaging="Tape and Reel", Pins=2, Pricing="1=0.11, 10=0.074, 50=0.0424, 100=0.0329, 500=0.02474, 1000=0.01944 (USD)", Reach SVHC Compliant=Yes, RoHS=TRUE, RoHS Compliant=Yes, Stock=4063890, Supplier=Digikey, Temperature Characteristics Code=X7R, Temperature Range Low=-55°C, Terminal Finish=Nickel, Termination=Wraparound, Tolerance (fill in as +-)=10%, Width=0.8mm
D1: library part CMP-2000-05191-1, "TVS Diode Array, 30 pF, 30 KV, -40 to 85 degC, 4-Pin SOT143, RoHS, Tape and Reel", Capacitance Value=30pF, Clamping Voltage=8V, Leakage Current=0.1uA, Manufacturer=Littelfuse, Operating Temp Range=-40Cto85C, Operating Temperature Classification=Industrial, Operating Temperature Max Deg. C=85C, Operating Temperature Min Deg. C=-40C, Package / Case=SOT-143, Reverse Stand-off Voltage=5.5(Min)V, Working Voltage=5.5V, Working Voltage (Max)=5.5V(Min), Clamping Voltage (Max)=8V, Configuration=Triple, Datasheet URL=https://datasheet.ciiva.com/15143/getdatasheetpartid-116020-15143550.pdf, Datasheet Version=Dec-13, Direction Type=Uni-Directional, Leakage Current (Max)=0.1uA, Manufacturer URL=http://www.littelfuse.com/, Mounting=SurfaceMount, Mounting Style=SurfaceMount, Number of Elements=3, Package Type=SOT-143, Packaging=TapeandReel, Pin Count=3+Tab, Polarity=Uni-Directional, Product Depth (mm)=1.4mm, Product Height (mm)=1.05mm, Product Length (mm)=3.04mm, Rad Hardened=No, Suppressor Type=TVS
D2 D3: library part CMP-1426-00012-2, Case Code (Imperial)=0805, Case Code (Metric)=2012, Color=Yellow, Forward Current=100mA, Forward Voltage=2V, Manufacturer="Wurth Electronics", Max Junction Temperature (Tj)=95°C, Max Operating Temperature=85°C, Max Reverse Voltage (DC)=5V, Min Operating Temperature=-40°C, Power Dissipation=72mW, Supplier Part Number=732-4987-1-ND, Test Current=20mA, Case/Package=0805, Category=LEDs, Channels=1, ComponentLink1Description=https://datasheet.ciiva.com:443/pdfs/VipMasterIC/IC/MIDC/MIDC-S-A0007455942/MIDC-S-A0007455942-1.pdf?src-supplier=IHS+Markit, ComponentLink1URL=https://datasheet.ciiva.com:443/pdfs/VipMasterIC/IC/MIDC/MIDC-S-A0007455942/MIDC-S-A0007455942-1.pdf?src-supplier=IHS+Markit, ComponentLink2Description=https://datasheet.ciiva.com/23843/150080ys75000-23843256.pdf?src-supplier=Newark, ComponentLink2URL=https://datasheet.ciiva.com/23843/150080ys75000-23843256.pdf?src-supplier=Newark, ComponentLink3Description=https://datasheet.ciiva.com/29279/759438-da-01-en-chipled-0805-w-kl-gelb-150080ys75000-29279034.pdf?src-supplier=Conrad, ComponentLink3URL=https://datasheet.ciiva.com/29279/759438-da-01-en-chipled-0805-w-kl-gelb-150080ys75000-29279034.pdf?src-supplier=Conrad, ComponentLink4Description=https://datasheet.ciiva.com/22656/1911353-22656971.pdf?src-supplier=Element14, ComponentLink4URL=https://datasheet.ciiva.com/22656/1911353-22656971.pdf?src-supplier=Element14, ComponentLink5Description=https://datasheet.ciiva.com/29563/150080ys75000-29563020.pdf?src-supplier=Digikey, ComponentLink5URL=https://datasheet.ciiva.com/29563/150080ys75000-29563020.pdf?src-supplier=Digikey, ComponentLink6Description=https://datasheet.ciiva.com/29563/150080ys75000-29563019.pdf?src-supplier=Digikey, ComponentLink6URL=https://datasheet.ciiva.com/29563/150080ys75000-29563019.pdf?src-supplier=Digikey, ComponentLink7Description=https://datasheet.ciiva.com/29563/150080ys75000-29563021.pdf?src-supplier=Digikey, ComponentLink7URL=https://datasheet.ciiva.com/29563/150080ys75000-29563021.pdf?src-supplier=Digikey, Dominant Wavelength=590nm, Height=700µm, Length=2mm, Lens Style="Clear, Rectangular", Luminous Intensity=120mcd, Luminous Intensity-Nom=120mcd, Manufacturer Part Number=150080YS75000, Mount="Surface Mount", Mounting Technology="Surface Mount", NexarPartId=29717784, Optoelectronic Device Type="SINGLE COLOR LED", Overall Height=0.7mm, Packaging="Tape and Reel", Peak Wavelength=595nm, Pins=2, Pricing="1=0.19, 50=0.176, 100=0.151, 500=0.131 (USD)", REACH SVHC=Unknown, Reach SVHC Compliant=Yes, Reverse Voltage=5V, RoHS=Compliant, RoHS Compliant=Yes, Shape=Rectangular, Size=1.4mm, Stock=32209, Supplier=Digikey, Terminal Pitch=2.1mm, Viewing Angle=140°, Wavelength=590nm, Width=1.25mm
J1 J2 J3 J5: library part CMP-02366-000003-1, "CONN MOD JACK 8P8C R/A UNSHLD", Current Rating=1.5A, Flammability Rating="UL94 V-0", Insulation Color=Black, Manufacturer=Amphenol, Package=CONN_MOD_JACK, Supplier Part Number=RJHSE-5080-ND, Temperature="-55°C to +85°C", Temperature Range High=+85°C, Temperature Range Low=-55°C, Voltage Rating=125V, Automotive=No, Body Breadth=0.52inch, Body Depth=0.59inch, Body Length=0.62inch, Body/Shell Style=JACK, Category=Conn, ComponentLink1Description=https://datasheet.ciiva.com:443/pdfs/VipMasterIC/IC/AMPH/AMPH-S-A0001396201/AMPH-S-A0001290431-1.pdf?src-supplier=IHS+Markit, ComponentLink1URL=https://datasheet.ciiva.com:443/pdfs/VipMasterIC/IC/AMPH/AMPH-S-A0001396201/AMPH-S-A0001290431-1.pdf?src-supplier=IHS+Markit, ComponentLink2Description=Datasheet, ComponentLink2URL=https://cdn.amphenol-icc.com/media/wysiwyg/files/documentation/datasheet/inputoutput/io-modjack-rjhse.pdf, ComponentLink3Description=https://datasheet.ciiva.com/685/rjhse5080-685586.pdf?src-supplier=Digikey, ComponentLink3URL=https://datasheet.ciiva.com/685/rjhse5080-685586.pdf?src-supplier=Digikey, ComponentLink4Description=https://datasheet.ciiva.com/7629/1682821-7629402.pdf?src-supplier=Element14, ComponentLink4URL=https://datasheet.ciiva.com/7629/1682821-7629402.pdf?src-supplier=Element14, ComponentLink5Description=https://datasheet.ciiva.com/15171/getdatasheetpartid-643190-15171163.pdf?src-supplier=Verical, ComponentLink5URL=https://datasheet.ciiva.com/15171/getdatasheetpartid-643190-15171163.pdf?src-supplier=Verical, ComponentLink6Description=https://datasheet.ciiva.com/1432/1693748-1432448.pdf?src-supplier=Element14, ComponentLink6URL=https://datasheet.ciiva.com/1432/1693748-1432448.pdf?src-supplier=Element14, Conn Gender=Female, Conn Orientation="Right Angle", Connector Type="TELECOM AND DATACOM CONNECTOR", Contact Finish - Mating="GOLD (50) OVER NICKEL (50)", Contact Finish - Termination="Matte Tin (Sn)", Contact Gender=Female, Contact Material=Gold,Nickel, Contact Style="TELCOM, MODULAR", Device Class L1=Connectors, Device Class L2="Modular / Ethernet Connectors", Device Class L3=unset, Digikey Description="CONN MOD JACK 8P8C R/A UNSHLD", DIN Conformance=No, Empty Shell=No, Filter Feature=No, Footprint Url=https://cdn.amphenol-icc.com/media/wysiwyg/files/drawing/rjhse5080.pdf?__cf_chl_jschl_tk__=e349db0bbbb6188a39347cd5e541b92fa02c9719-1587748343-0-AW7tChdeHzRPLX9gSWj7WrKaXQoY9BsmT9Ek0h-T62M9y3Rs9iypFcOtkzb-6sGYQEjFE-jcoNciDETCOZrh1rYyOesac5SvYLoLwHIsHvF4AKBlx-MXmfZUVk9OTTJLqyQq2qMm0PFRLJpNcK0nrKResqOniRSYixG2sPTmOPraH-ULJFBDL602CHqcI9KKBgTq90Jh1OL2Td4moJ99rFsJRJ1Tk_uoxGe8ublcP_ARu-uLpWcQrBcwOcHDTAwL29DAwVaqcH7ta8Ks7WMlHmVl_pILeEDwT0bE9vu5Pa5S3PtNRF1leuFkgi_FMbUxTDulc5xzbXSfng8srUIV1lWXny5nx1fZJEUa_w97yKjffzBMxiWLWVN-V7-uqAaPbyv_m-wRyw5O25OZNyJOeGU, Height=0.535inch, IEC Conformance=No, Insulation Material=Thermoplastic, Is Female=yes, JESD-609 Code=e3, Lead Free=Yes, Manufacturer Part Number=RJHSE-5080, MIL Conformance=No, Mixed Contacts=No, Mounting Option 1=LOCKING, Mounting Style="RIGHT ANGLE", Mounting Technology=Panel,Board, Mouser Description="Modular Connectors / Ethernet Connectors R/A RJ45 NONSHIELDED 8 CONT NO LEDS", Number Of Contacts=8, Number of Ports=1, Octopart=https://octopart.com/rjhse-5080-amphenol-45060, Option="General Purpose", PCB Contact Pattern=STAGGERED, Pitch=1.02mm, Plating Thickness=50uin, Pricing="1=1.03, 10=0.867, 36=0.83194, 72=0.81417, 108=0.7788, 252=0.70802, 504=0.6372, 1008=0.56641, 2520=0.51331 (USD)", Reach SVHC Compliant=Yes, Reference Standard=UL, Reliability=COMMERCIAL, RoHS=TRUE, RoHS Compliant=Yes, Shell Material=Polyethylene, Stock=69947, Supplier=Digikey, Terminal Length=0.1inch, Terminal Pitch=2.032mm, Termination=Solder
J4: library part CMP-2000-05610-1, "Right Angle Female Type AB Micro USB Connector, 30 V, 1.8 A, -30 to 85 degC, RoHS, Tape and Reel", Color=Black, Current Rating=1.8A, Manufacturer=Molex, Operating Temperature Range=-20Cto+85C, Package Description="Micro USB Connector, Pitch 0.65 mm, 5 Positions, Body 7.5 x 5.6 mm", Voltage Rating=30VAC, Brand=Molex, Connector Type=MicroUSBTypeABreceptacle, Contact Material=CopperAlloy, Contact Plating=Gold, Datasheet URL=http://www.molex.com/webdocs/datasheets/pdf/en-us/0475890001_IO_CONNECTORS.pdf, Datasheet Version=12/2016, Gender=Female, Manufacturer URL=http://www.molex.com/, Mounting Angle=Right, Mounting Technology=SurfaceMount, Number Of Contacts=5Contact, Number of Ports=1Port, Package Reference=47589-0001, Package URL=http://www.molex.com/pdm_docs/sd/475890001_sd.pdf, Packaging=Reel, Product=MicroUSBTypeABConnectors, Product Category=USBConnectors, RoHS=True, Series=47589, Standard=USB, Termination Style=SMD/SMT
L1: library part CMP-0220-00169-1, "SMD EMI Suppression Ferrite Bead WE-CBF, Z = 2200 Ohm", Case Code=0805, Clock Frequency=100MHz, Current Rating=200mA, DC Resistance-Max=600mR, Manufacturer="Wurth Electronics", Max Operating Temperature=125°C, Min Frequency=80MHz, Min Operating Temperature=-55°C, Supplier Part Number=732-1609-1-ND, Category="Ferrite Beads and Chips", Channels=1, ComponentLink1Description="Manufacturer Link", ComponentLink1URL=http://www.we-online.com, ComponentLink2Description=Datasheet, ComponentLink2URL=http://www.we-online.de/katalog/media/pdf/742792093.pdf, ComponentLink3Description=https://datasheet.ciiva.com:443/pdfs/VipMasterIC/IC/MIDC/MIDC-S-A0008919821/MIDC-S-A0008919976-1.pdf?src-supplier=IHS+Markit, ComponentLink3URL=https://datasheet.ciiva.com:443/pdfs/VipMasterIC/IC/MIDC/MIDC-S-A0008919821/MIDC-S-A0008919976-1.pdf?src-supplier=IHS+Markit, ComponentLink4Description=https://datasheet.ciiva.com/1475/742792093-1475025.pdf?src-supplier=Farnell, ComponentLink4URL=https://datasheet.ciiva.com/1475/742792093-1475025.pdf?src-supplier=Farnell, ComponentLink5Description=https://datasheet.ciiva.com/11799/0900766b80bbd134-11799557.pdf?src-supplier=Rs, ComponentLink5URL=https://datasheet.ciiva.com/11799/0900766b80bbd134-11799557.pdf?src-supplier=Rs, ComponentLink6Description=https://datasheet.ciiva.com/4940/742792093-88569-4940476.pdf?src-supplier=Mouser, ComponentLink6URL=https://datasheet.ciiva.com/4940/742792093-88569-4940476.pdf?src-supplier=Mouser, ComponentLink7Description=https://datasheet.ciiva.com/1013/742792093-1013376.pdf?src-supplier=Digikey, ComponentLink7URL=https://datasheet.ciiva.com/1013/742792093-1013376.pdf?src-supplier=Digikey, ComponentLink8Description=https://datasheet.ciiva.com/14122/742792093-eng-tds-14122810.pdf?src-supplier=Distrelec, ComponentLink8URL=https://datasheet.ciiva.com/14122/742792093-eng-tds-14122810.pdf?src-supplier=Distrelec, Construction=Multi-Layer, DatasheetVersion=Dec-2005, Filter Type="FERRITE CHIP", Height=0.9mm, Impedance="2200 Ohm", JESD-609 Code=e3, Length=2mm, Manufacturer Part Number=742792093, Material=Ferrite, Mounting Technology="Surface Mount", Output Impedance=2.2kR, PackageDescription="Chip Inductor, 2-Leads, Body 2.0 x 1.2 mm", PackageReference=SMD-0805, PackageVersion=2005, Pricing="1=0.21, 50=0.209, 100=0.192, 500=0.183, 1000=0.176, 2000=0.167 (USD)", Reach SVHC Compliant=Yes, RoHS=Yes, RoHS Compliant=Yes, Stock=137435, Supplier=Digikey, Terminal Finish=Nickel, Width=1.2mm
MD1: library part CMP-194065-000026-1, "RX TXRX MOD WIFI TRACE ANT SMD"
P1 P2: library part CMP-1502-01062-2, Color=Black, Contact Resistance=20mΩ, Current Rating=3A, Max Operating Temperature=105°C, Min Operating Temperature=-40°C, Operating Supply Voltage=250V, Connector Type="Male Pin", Contact Material=Copper, Contact Mating Length=5.9944mm, Contact Plating=Gold, Gender=Male, Height=8.94mm, Lead Free="Lead Free", Lead Pitch=2.54mm, Mount="Through Hole", NexarPartId=32855521, Number Of Contacts=3, Number of Pins=3, Number of Positions=3, Number of Rows=1, Orientation=Vertical, Packaging=Bulk, Pitch=2.54mm, REACH SVHC=Unknown, RoHS=Compliant, Termination=Solder, Voltage Rating=250V
Q1 Q2: library part CMP-20235-000001-1, "NPN TRANSISTOR 1.5A 40V SOT-23 R", Case/Package=TO-236-3, Collector Emitter Breakdown Voltage=25V, Collector Emitter Voltage (VCEO)=400mV, Max Collector Current=1.5A, Max Power Dissipation=300mW, Transition Frequency=100MHz, Max Breakdown Voltage=25V, Mount="Surface Mount", Packaging="Tape and Reel", RoHS Compliant=Yes
R1 R2 R3 R4 R5 R6 R8 R10 R12 R14 R16 R17 R18 R20 R21 R22: library part CMP-2003-04635-1, Case/Package=1206, Manufacturer="Vishay Dale", Manufacturer Series=TNPW, Max Operating Temperature=125°C, Min Operating Temperature=-55°C, Package Shape=Rectangular, Power=250mW, Rated Temperature=70°C, Resistor Type="FIXED RESISTOR", Supplier Part Number=541-3833-1-ND, Temperature Coefficient=25ppm/°C, Tolerance=0.1%, Working Voltage=200V, Category="Chip SMD Resistors", ComponentLink1Description=https://datasheet.ciiva.com:443/pdfs/VipMasterIC/IC/DALE/DALES05753/DALES05753-1.pdf?src-supplier=IHS+Markit, ComponentLink1URL=https://datasheet.ciiva.com:443/pdfs/VipMasterIC/IC/DALE/DALES05753/DALES05753-1.pdf?src-supplier=IHS+Markit, ComponentLink2Description=https://datasheet.ciiva.com/2613/tnpw-e3-2613292.pdf?src-supplier=Digikey, ComponentLink2URL=https://datasheet.ciiva.com/2613/tnpw-e3-2613292.pdf?src-supplier=Digikey, ComponentLink3Description=https://datasheet.ciiva.com/8979/tnpw-e3-8979929.pdf?src-supplier=Avnet, ComponentLink3URL=https://datasheet.ciiva.com/8979/tnpw-e3-8979929.pdf?src-supplier=Avnet, ComponentLink4Description=https://datasheet.ciiva.com/8981/tnpw-e3-8981015.pdf?src-supplier=Avnet, ComponentLink4URL=https://datasheet.ciiva.com/8981/tnpw-e3-8981015.pdf?src-supplier=Avnet, JESD-609 Code=e3, Manufacturer Part Number=TNPW1206100RBEEN, Mounting Technology="Surface Mount", Packaging="Tape and Reel", Part Number=TNPW1206100RBEEN, Pins=2, Pricing="1=0.93, 10=0.658, 50=0.5002, 100=0.4416, 500=0.32664 (USD)", Reach SVHC Compliant=Yes, RoHS=Yes, RoHS Compliant=Yes, Stock=9436, Supplier=Digikey, Technology="THIN FILM", Terminal Finish=Tin, Termination=Wraparound
R19 R23 R24 R30 R33 R34: library part CMP-1659-00013-4, "Chip Resistor, 10 KOhm, +/- 1%, 0.125 W, -55 to 155 degC, 0805 (2012 Metric), RoHS, Tape and Reel", Case/Package=0805, Manufacturer=Yageo, Max Operating Temperature="155 degC", Min Operating Temperature="-55 degC", Package Height=0.5mm, Package Length=2mm, Package Quantity=5000, Package Shape=Rectangular, Package Style=SMTMeter, Package Width=1.25mm, Power=125mW, Rated Temperature=70°C, Resistor Type="FIXED RESISTOR", Supplier Part Number=311-10.0KCRCT-ND, Temperature Coefficient=100ppm/°C, Tolerance=1%, Voltage Rating="150 V", Working Voltage=150V, Additional Feature="LASER TRIMMABLE", Category="Chip SMD Resistors", ComponentLink1Description="Manufacturer URL", ComponentLink1URL=http://www.yageo.com/, ComponentLink2Description=Datasheet, ComponentLink2URL=http://www.yageo.com/documents/recent/PYu-RC_Group_51_RoHS_L_04.pdf, ComponentLink3Description=https://datasheet.ciiva.com:443/pdfs/VipMasterIC/IC/YAGO/YAGO-S-A0008145938/YAGO-S-A0008145938-1.pdf?src-supplier=IHS+Markit, ComponentLink3URL=https://datasheet.ciiva.com:443/pdfs/VipMasterIC/IC/YAGO/YAGO-S-A0008145938/YAGO-S-A0008145938-1.pdf?src-supplier=IHS+Markit, ComponentLink4Description=https://datasheet.ciiva.com/11808/0900766b8106beab-11808151.pdf?src-supplier=Rs, ComponentLink4URL=https://datasheet.ciiva.com/11808/0900766b8106beab-11808151.pdf?src-supplier=Rs, ComponentLink5Description=https://datasheet.ciiva.com/46447/444164-46447563.pdf?src-supplier=Element14, ComponentLink5URL=https://datasheet.ciiva.com/46447/444164-46447563.pdf?src-supplier=Element14, ComponentLink6Description=https://datasheet.ciiva.com/2456/pyu-r-int-thick-7-2456973.pdf?src-supplier=Digikey, ComponentLink6URL=https://datasheet.ciiva.com/2456/pyu-r-int-thick-7-2456973.pdf?src-supplier=Digikey, ComponentLink7Description=https://datasheet.ciiva.com/2456/pyu-r-int-thick-7-2456974.pdf?src-supplier=Digikey, ComponentLink7URL=https://datasheet.ciiva.com/2456/pyu-r-int-thick-7-2456974.pdf?src-supplier=Digikey, ComponentLink8Description=https://datasheet.ciiva.com/2456/pyu-r-int-thick-7-2456972.pdf?src-supplier=Digikey, ComponentLink8URL=https://datasheet.ciiva.com/2456/pyu-r-int-thick-7-2456972.pdf?src-supplier=Digikey, ComponentLink9Description=https://datasheet.ciiva.com/12669/rc0805-12669688.pdf?src-supplier=Mouser, ComponentLink9URL=https://datasheet.ciiva.com/12669/rc0805-12669688.pdf?src-supplier=Mouser, ComponentLink10Description=https://datasheet.ciiva.com/16747/rc0805-16747087.pdf?src-supplier=Future+Electronics, ComponentLink10URL=https://datasheet.ciiva.com/16747/rc0805-16747087.pdf?src-supplier=Future+Electronics, Construction=Chip, DatasheetVersion="Rev. 4, 02/2016", Height="0.5 mm", JESD-609 Code=e3, Length="2 mm", Manufacturer Part Number=RC0805FR-0710KL, Mount="Surface Mount", Mounting Technology="Surface Mount", PackageDescription="2-Pin Surface Mounted Device, Body 2 x 1.25 mm", PackageReference=0805, Packaging="Tape and Reel", Pins=2, Pricing="1=0.1, 10=0.027, 50=0.017, 100=0.0142, 500=0.00976, 1000=0.00844 (USD)", REACH SVHC="No SVHC", Reach SVHC Compliant=Yes, RoHS=Yes, RoHS Compliant=Yes, RoHSCompliant=true, Stock=4430741, Supplier=Digikey, Technology="METAL GLAZE/THICK FILM", Terminal Finish=Nickel, Termination=Wraparound
R25 R26: library part CMP-2001-04896-1, Case/Package=0805, Manufacturer="Vishay Dale", Max Operating Temperature=155°C, Min Operating Temperature=-55°C, Package Height=0.45mm, Package Length=2mm, Package Shape=Rectangular, Package Style=SMTMeter, Package Width=1.25mm, Power=125mW, Rated Temperature=70°C, Resistor Type="FIXED RESISTOR", Supplier Part Number=541-0.0ACT-ND, Category="Chip SMD Resistors", ComponentLink1Description=https://datasheet.ciiva.com:443/pdfs/VipMasterIC/IC/VISH/VISH-S-A0007266705/VISH-S-A0007266705-1.pdf?src-supplier=IHS+Markit, ComponentLink1URL=https://datasheet.ciiva.com:443/pdfs/VipMasterIC/IC/VISH/VISH-S-A0007266705/VISH-S-A0007266705-1.pdf?src-supplier=IHS+Markit, ComponentLink2Description=https://datasheet.ciiva.com/11811/0900766b80d98b26-11811304.pdf?src-supplier=Rs, ComponentLink2URL=https://datasheet.ciiva.com/11811/0900766b80d98b26-11811304.pdf?src-supplier=Rs, ComponentLink3Description=https://datasheet.ciiva.com/7841/1720486-7841839.pdf?src-supplier=Element14, ComponentLink3URL=https://datasheet.ciiva.com/7841/1720486-7841839.pdf?src-supplier=Element14, ComponentLink4Description=https://datasheet.ciiva.com/26314/fld-crcw-e3-data-en-26314630.pdf?src-supplier=Distrelec, ComponentLink4URL=https://datasheet.ciiva.com/26314/fld-crcw-e3-data-en-26314630.pdf?src-supplier=Distrelec, ComponentLink5Description=https://datasheet.ciiva.com/7841/1697337-7841629.pdf?src-supplier=Element14, ComponentLink5URL=https://datasheet.ciiva.com/7841/1697337-7841629.pdf?src-supplier=Element14, ComponentLink6Description=https://datasheet.ciiva.com/2463/dcrcwe3-2463038.pdf?src-supplier=Digikey, ComponentLink6URL=https://datasheet.ciiva.com/2463/dcrcwe3-2463038.pdf?src-supplier=Digikey, ComponentLink7Description=https://datasheet.ciiva.com/2463/dcrcwe3-2463039.pdf?src-supplier=Digikey, ComponentLink7URL=https://datasheet.ciiva.com/2463/dcrcwe3-2463039.pdf?src-supplier=Digikey, ComponentLink8Description=https://datasheet.ciiva.com/2463/dcrcwe3-2463037.pdf?src-supplier=Digikey, ComponentLink8URL=https://datasheet.ciiva.com/2463/dcrcwe3-2463037.pdf?src-supplier=Digikey, ComponentLink9Description=https://datasheet.ciiva.com/16719/70201119-16719706.pdf?src-supplier=Allied+Electronics, ComponentLink9URL=https://datasheet.ciiva.com/16719/70201119-16719706.pdf?src-supplier=Allied+Electronics, ComponentLink10Description=https://datasheet.ciiva.com/5543/dcrcwe3-109170-5543096.pdf?src-supplier=Mouser, ComponentLink10URL=https://datasheet.ciiva.com/5543/dcrcwe3-109170-5543096.pdf?src-supplier=Mouser, ComponentLink11Description=https://datasheet.ciiva.com/16389/dcrcwe3-16389338.pdf?src-supplier=Future+Electronics, ComponentLink11URL=https://datasheet.ciiva.com/16389/dcrcwe3-16389338.pdf?src-supplier=Future+Electronics, Construction=Chip, JESD-609 Code=e3, Manufacturer Part Number=CRCW08050000Z0EA, Mounting Technology="Surface Mount", Packaging="Tape and Reel", Part Number=CRCW08050000Z0EA, Pins=2, Pricing="1=0.1, 10=0.043, 25=0.0324, 50=0.0248, 100=0.0173, 250=0.01392, 500=0.01112, 1000=0.00819 (USD)", Reach SVHC Compliant=Yes, Reference Standard=AEC-Q200, RoHS=Yes, RoHS Compliant=Yes, Stock=996898, Supplier=Digikey, Technology="METAL GLAZE/THICK FILM", Terminal Finish=Nickel, Termination=Wraparound